# EAGLE board IV51 (EAGLE 7.6.0)
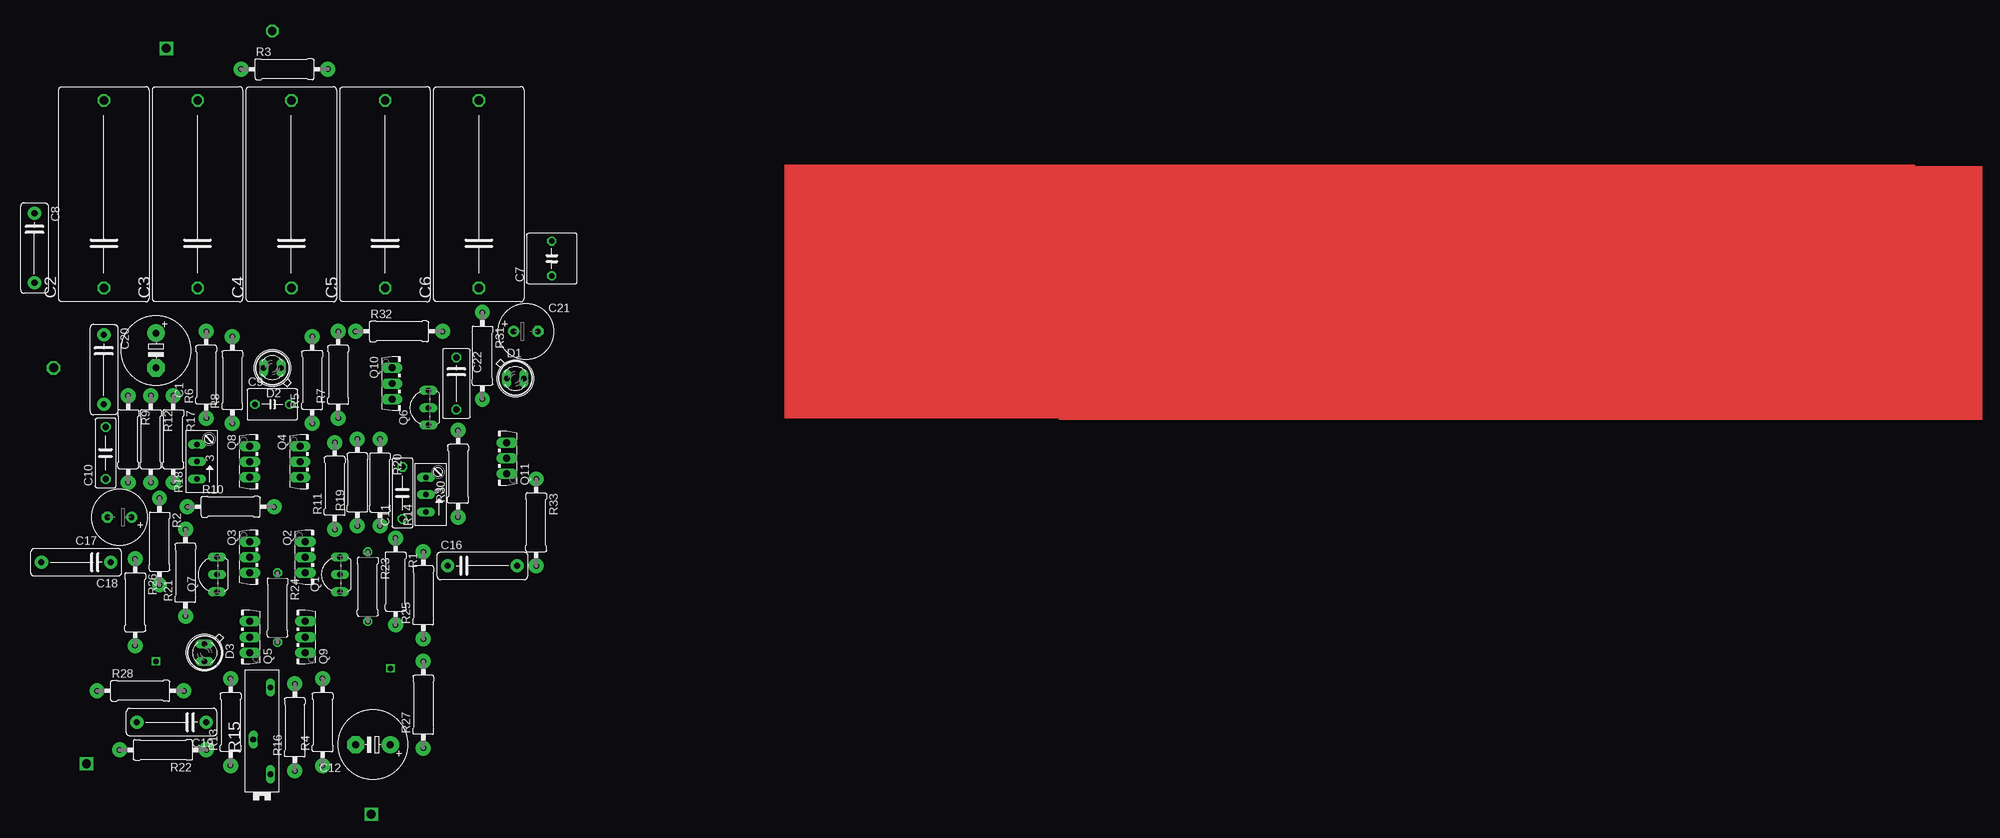
[diagram p0: board, top side]
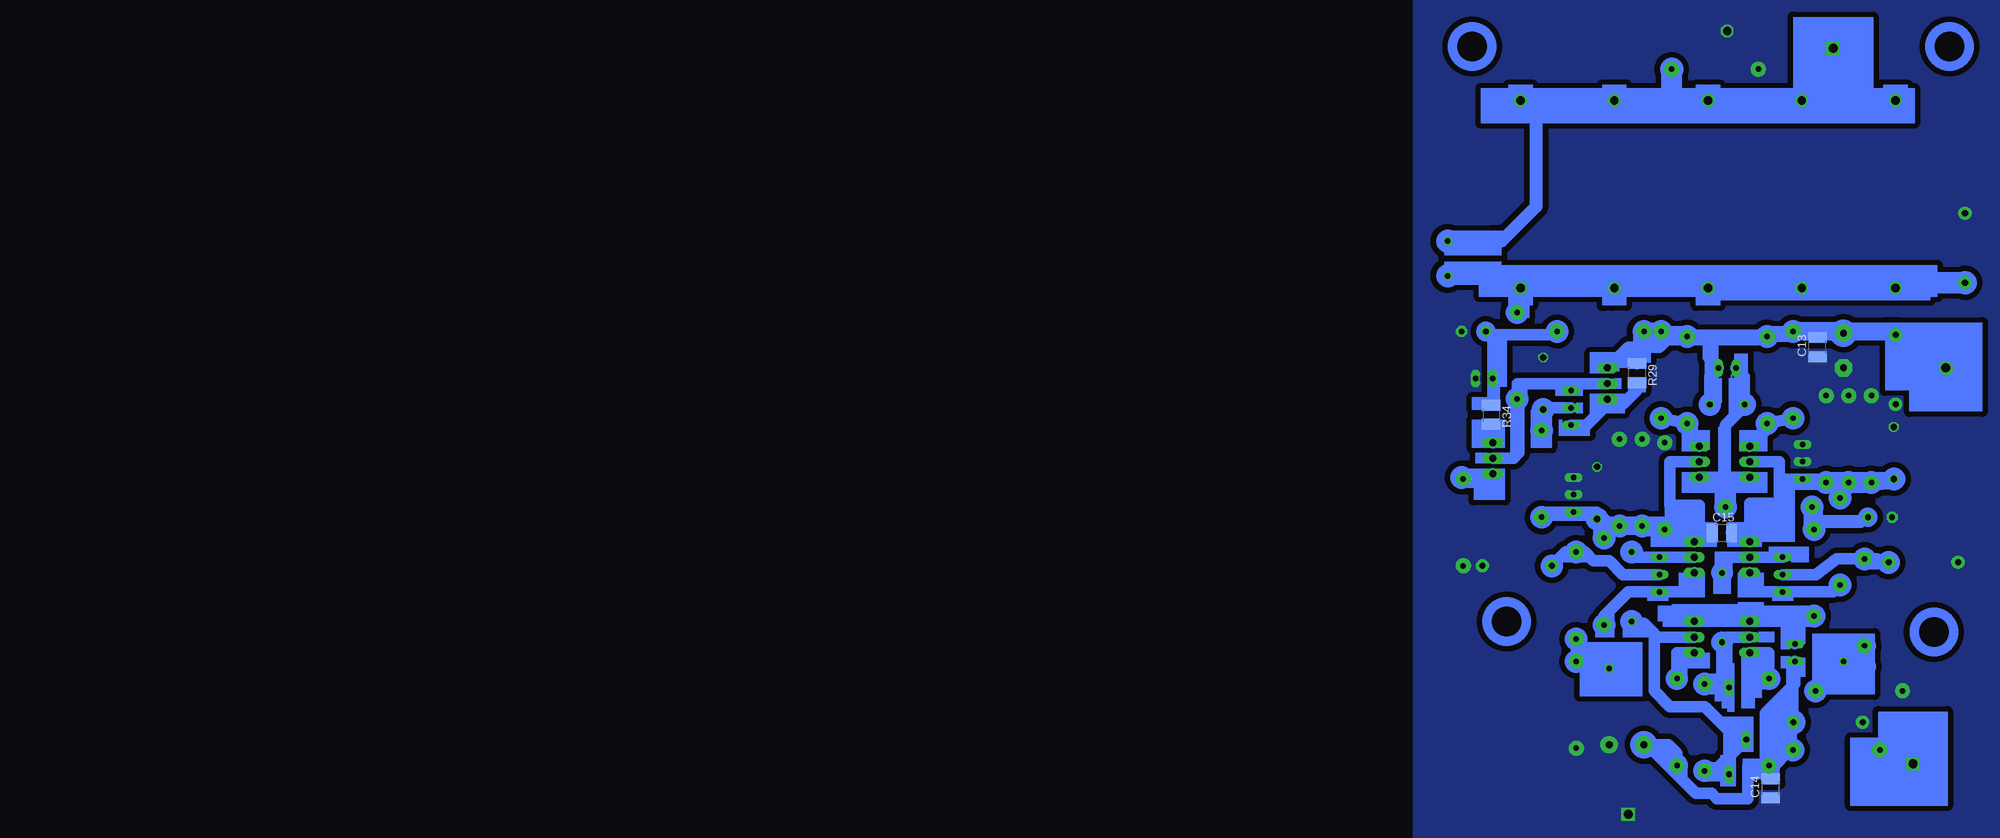
[diagram p1: board, bottom side, seen from below]

No outline drawn. Coordinates in mm, seen from the top.
Copper layers (1*16): Top 0.035mm / dielectric 1.5mm / Bottom 0.035mm
Design rules "default": minimum track width 10mil, minimum drill 24mil, track to track 8mil, track to pad 8mil, pad to pad 8mil, via to via 8mil, smd to smd 8mil, copper to edge 40mil, drill to drill 8mil, minimum pad ring 10mil, minimum via ring 8mil, stop-mask expansion 4mil, vias tented up to drill 0mil, thermal gap 10mil

## Footprints (pad centres in the part's own frame; a part is rotated, then mirrored left to right if it is on the bottom)
E5-10,5 = drill 1.016 pad 2.54: + -2.54,0 | drill 1.016 pad 2.54 octagon: - 2.54,0
C275-134X316 = drill 1.194 octagon: 1 -13.716,0; 2 13.716,0
C050-075X075 = drill 0.813 octagon: 1 -2.54,0; 2 2.54,0
C102-043X133 = drill 0.9 pad 1.93: 1 -5.08,0; 2 5.08,0
C050-045X075 = drill 0.813 octagon: 1 -2.54,0; 2 2.54,0
C075-032X103 = drill 0.914 octagon: 1 -3.81,0; 2 3.81,0
C1210 = smd 1.6 x 2.7: 1 -1.4,0; 2 1.4,0
E3,5-8 = drill 0.813 pad 1.6: + -1.778,0 | drill 0.813 pad 1.6 octagon: - 1.778,0
C075-042X103 = drill 0.914 octagon: 1 -3.81,0; 2 3.81,0
SFH482 = drill 0.813 long: A -1.27,0; K 1.27,0
TO92-EBC = drill 0.813 long: B 0,-1.27; C -2.54,-1.27; E 2.54,-1.27
TO126AV = drill 1.016 long: B 2.286,-1.27; C 0,-1.27; E -2.286,-1.27
0309/12 = drill 0.8 pad 2.184: 1 -6.35,0; 2 6.35,0
RJ9W = drill 0.813 long: A 2.54,0.635; E -2.54,0.635; S 0,0.635
PT-SPIN = drill 0.813 long: A -6.35,-1.27; E 6.35,-1.27; S -1.27,1.27
0309/10 = drill 0.813 octagon: 1 -5.08,0; 2 5.08,0
R1210 = smd 1.6 x 2.7: 1 -1.4,0; 2 1.4,0

## Placement (x,y rotation side)
C1  100uF  [E5-10,5]  -102.62,74.42 270 top
C2  1u5  [C275-134X316]  -110.24,97.28 90 top
C3  1uF  [C275-134X316]  -96.52,97.28 90 top
C4  1uF  [C275-134X316]  -82.8,97.28 90 top
C5  1uF  [C275-134X316]  -69.09,97.28 90 top
C6  1uF  [C275-134X316]  -55.37,97.28 90 top
C7  .1u  [C050-075X075]  -44.7,87.88 90 top
C8  470pF  [C102-043X133]  -120.4,89.41 270 top
C9  680pF  [C050-045X075]  -85.6,66.55 0 top
C10  820pF  [C075-032X103]  -109.98,59.44 90 top
C11  820pF  [C075-032X103]  -66.55,53.59 90 top
C12  100uF  [E5-10,5]  -70.87,16.76 180 top
C13  3n9  [C1210]  -98.81,74.93 90 bottom
C14  3n9  [C1210]  -91.95,10.41 90 bottom
C15  33pF  [C1210]  -84.84,47.75 0 bottom
C16  470pF  [C102-043X133]  -54.86,42.93 0 top
C17  100uF  [E3,5-8]  -107.95,50.04 180 top
C18  470pF  [C102-043X133]  -114.3,43.43 180 top
C19  470nF  [C102-043X133]  -100.33,20.07 180 top
C20  470nF  [C102-043X133]  -110.24,71.63 270 top
C21  100uF  [E3,5-8]  -48.51,77.22 0 top
C22  470pF  [C075-042X103]  -58.67,69.6 270 top
D1  GRN  [SFH482]  -50.04,70.36 0 top
D2  GRN  [SFH482]  -85.6,71.88 180 top
D3  GRN  [SFH482]  -95.5,30.23 270 top
Q1  K170  [TO92-EBC]  -76.96,41.66 90 top
Q2  BD140  [TO126AV]  -79.5,44.2 270 top
Q3  BD140  [TO126AV]  -87.63,44.2 270 top
Q4  BD140  [TO126AV]  -80.26,58.17 270 top
Q5  BD139  [TO126AV]  -90.17,32.51 90 top
Q6  BC550C  [TO92-EBC]  -64.01,66.04 90 top
Q7  K170  [TO92-EBC]  -95,41.66 90 top
Q8  BD140  [TO126AV]  -87.63,58.17 270 top
Q9  BD139  [TO126AV]  -82.04,32.51 90 top
Q10  BD140  [TO126AV]  -66.8,69.6 270 top
Q11  BD139  [TO126AV]  -52.58,58.67 90 top
R1  1K  [0309/12]  -67.56,40.64 270 top
R2  1K  [0309/12]  -102.11,46.48 270 top
R3  49K  [0309/12]  -83.82,115.57 0 top
R4  75  [0309/12]  -78.23,20.07 90 top
R5  39  [0309/12]  -79.76,70.1 90 top
R6  39  [0309/12]  -95.25,70.87 90 top
R7  330  [0309/12]  -75.95,70.87 90 top
R8  330  [0309/12]  -91.44,70.1 90 top
R9  4K  [0309/12]  -106.68,61.47 270 top
R10  4K  [0309/12]  -91.69,51.56 0 top
R11  1K74  [0309/12]  -76.45,54.61 90 top
R12  1K74  [0309/12]  -103.38,61.47 270 top
R13  75  [0309/12]  -91.69,20.07 90 top
R14  10K  [RJ9W]  -62.48,53.34 90 top
R15  500  [PT-SPIN]  -87.12,18.8 90 top
R16  118  [0309/12]  -82.3,19.3 90 top
R17  1K74  [0309/12]  -100.08,61.47 270 top
R18  10K  [RJ9W]  -96.01,58.17 90 top
R19  1K74  [0309/12]  -73.15,55.12 90 top
R20  4K  [0309/12]  -69.85,55.12 270 top
R21  4K  [0309/12]  -98.3,41.91 90 top
R22  75  [0309/12]  -101.6,16 180 top
R23  0  [0309/10]  -71.63,39.88 270 top
R24  0  [0309/10]  -84.84,36.83 270 top
R25  1K  [0309/12]  -63.5,38.61 90 top
R26  1K  [0309/12]  -105.66,37.59 270 top
R27  100K  [0309/12]  -63.5,22.61 90 top
R28  100K  [0309/12]  -104.9,24.64 0 top
R29  1K  [R1210]  -72.39,71.12 270 bottom
R30  1K74  [0309/12]  -58.42,56.39 90 top
R31  118  [0309/12]  -54.86,73.66 270 top
R32  4K  [0309/12]  -67.06,77.22 0 top
R33  118  [0309/12]  -46.99,49.28 270 top
R34  100  [R1210]  -51.05,65.02 270 bottom

## Library data of the parts
C1-C22 R1-R13 R16 R17 R19-R34 = resistor
D1-D3 = led
Q1 Q6 Q7 = transistor-npn
Q2-Q5 Q8-Q11 = transistor-power
R14 R15 R18 = pot

## Nets
AGND: C1.- C8.1 C10.2 C11.2 C12.+ C13.1 C14.1 C16.2 C17.- C18.2 C19.2 C20.2 C21.- C22.1 D1.K R3.1 R9.1 R11.2 R12.1 R14.A R14.S R17.1 R18.A R18.S R19.2 R20.1 R27.1 R28.1 R33.2
N$1: Q9.E R4.2
N$2: Q4.E R5.1 R7.1
N$3: C2.1 C3.1 C4.1 C5.1 C6.1 C7.1 C8.2 R31.1
N$4: Q1.C Q2.B R1.2
N$5: C1.+ C9.2 C13.2 C20.1 D2.A Q10.E R5.2 R6.2 R7.2 R8.2 R29.1 R32.1
N$6: Q3.B Q7.C R2.2
N$7: Q5.E R13.2
N$8: C17.+ R10.1 R21.2
N$9: C16.1 Q1.B R25.2
N$10: Q3.C Q7.E R24.1
N$11: Q8.E R6.1 R8.1
N$12: C10.1 C15.2 Q3.E Q8.C R2.1 R9.2 R12.2 R17.2 R18.E
N$13: C18.1 Q7.B R26.1
N$14: C9.1 D2.K Q4.B Q8.B R10.2
N$15: C22.2 Q6.B R30.2
N$16: Q1.E Q2.C R23.1
N$17: Q5.C R15.E R16.2 R24.2
N$18: Q9.C R15.A R15.S R16.1 R23.2
N$19: R25.1 R27.2
N$20: C12.- C14.2 C19.1 D3.K R4.1 R13.1 R22.1
N$21: D3.A Q5.B Q9.B R21.1
N$22: R26.2 R28.2
N$23: Q6.C Q10.B R29.2
N$24: Q6.E Q10.C Q11.C R31.2
N$25: Q11.B R34.2
N$27: C11.1 C15.1 Q2.E Q4.C R1.1 R11.1 R14.E R19.1 R20.2 R30.1
N$28: R22.2
N$29: C21.+ D1.A R32.2 R34.1
N$30: Q11.E R33.1
OUT: C2.2 C3.2 C4.2 C5.2 C6.2 C7.2 R3.2

## Tracks (layer width: path | path; a pad name or v marks a point on that pad's centre or on a via)
AGND  (via drill 1.2 pad 1.68, 1.3)
  other vias: -85.6,121.16 -71.12,6.6
  pour Bottom (isolate 0.813, no thermals): -40.13,129.29 -66.8,129.29 -96.52,129.21 -125.98,129.29 -125.98,1.02 -40.13,1.02
N$1
  Bottom 1.676: Q9.E -78.23,30.23 R4.2
N$2
  Bottom 1.676: Q4.E -79.76,62.23 R5.1 R7.1
N$3
  Bottom 1.676: R31.1 C6.1
  Bottom 1.93: C7.1 -53.59,85.34 C6.1 C5.1 C4.1 C3.1 C2.1 -111,84.33 C8.2 -120.65,84.33
N$4
  Bottom 1.676: Q2.B -81.03,39.12 Q1.C -71.12,39.12 -67.56,35.56 R1.2
N$5
  Bottom 1.676: C9.2 -83.06,70.61 D2.A -82.8,73.41 -82.8,76.45 | -82.8,76.45 R8.2 R6.2 -95.76,77.72 -98.55,77.72 | -82.8,76.45 R5.2 -78.58,76.69 | -78.58,76.69 R7.2 | -98.55,77.72 -102.62,77.72 | C1.+ -102.62,77.72 | C13.2 -98.55,76.58 -98.55,77.72 | Q10.E -71.12,74.93 | -71.12,74.93 -74.68,74.93 | -74.68,74.93 -75.69,74.93 -77.45,76.69 -78.58,76.69 | R29.1 -71.12,74.55 -71.12,74.93 | C20.1 -109.73,77.47 -102.87,77.47 -102.62,77.72 | R32.1 -74.68,75.44 -74.68,74.93
N$6
  Bottom 1.676: R2.2 -101.09,39.12 Q7.C -90.42,39.12 -88.9,40.64 Q3.B
N$7
  Bottom 1.676: Q5.E -91.69,30.23 R13.2
N$8
  Bottom 1.676: R10.1 -98.3,51.31 -98.3,49.28 | -98.3,49.28 R21.2 | C17.+ -105.16,49.28 -98.3,49.28
N$9
  Bottom 1.676: Q1.B -70.36,41.66 -68.33,43.69 -66.04,43.69 -64.77,44.96 R25.2 -61.98,44.96 C16.1
N$10
  Bottom 1.676: Q7.E Q3.C -86.11,44.2 -84.84,42.93 R24.1
N$11
  Bottom 1.676: Q8.E -91.44,62.99 R8.1 R6.1
N$12
  Bottom 1.676: Q8.C -93.22,58.17 -93.22,54.61 | -93.22,54.61 -93.22,52.07 -88.9,52.07 -88.9,47.75 | -109.73,55.63 -108.2,54.86 -106.43,54.86 | -106.43,54.86 -103.12,54.86 | -103.12,54.86 -102.11,54.86 | -102.11,54.86 -99.82,54.86 | -99.82,54.86 -93.47,54.86 -93.22,54.61 | C10.1 -109.73,55.63 | -109.47,55.63 -109.73,55.63 | R9.2 -106.43,54.86 | R12.2 -103.12,54.86 | R17.2 -99.82,54.86 | -99.82,54.86 -99.57,55.12 -96.27,55.12 -96.65,55.5 R18.E | R2.1 -102.11,54.86 | C15.2 -86.49,48.01 -88.65,48.01 -88.9,47.75 | -88.9,47.75 Q3.E
N$13
  Bottom 1.676: Q7.B -98.55,41.66 -101.6,43.94 R26.1 -107.44,43.94 C18.1
N$14
  Bottom 1.676: Q8.B -85.34,55.88 | -85.34,55.88 Q4.B | -85.34,55.88 -85.34,63.5 -88.14,66.29 C9.1 -88.14,70.61 D2.K | R10.2 -85.34,55.88
N$15
  Bottom 1.676: Q6.B -59.44,66.04 -59.31,65.91 | -59.31,65.91 -57.66,64.26 -57.66,62.74 R30.2 | C22.2 -58.8,65.91 -59.31,65.91
N$16
  Bottom 1.676: Q2.C Q1.E -72.39,44.2 R23.1
N$17
  Bottom 1.676: Q5.C -85.6,32.51 R24.2 -84.84,25.65 | -82.04,25.65 R16.2 -84.84,25.65 | -85.85,24.89 R15.E -85.34,25.65 -84.84,25.65
N$18
  Bottom 1.676: -85.85,14.99 -83.82,12.95 | -83.82,12.95 R16.1 | R15.A -85.34,12.95 -83.82,12.95 | R15.S -85.85,14.99 | -85.85,14.99 -85.85,12.7 | -85.85,14.99 -85.85,18.8 -82.3,22.35 -77.22,22.35 -74.93,24.64 -74.93,32.51 | -74.93,32.51 Q9.C | R23.2 -71.88,34.54 -73.41,34.54 -74.93,33.02 -74.93,32.51
N$19
  Bottom 1.676: R27.2 R25.1
N$20
  Bottom 1.676: -91.19,13.72 R13.1 -91.95,13.46 | -91.19,13.72 -88.65,13.72 -88.65,8.89 -84.07,8.89 -83.31,9.65 -81.03,9.65 -78.23,12.45 | -78.23,12.45 R4.1 -78.23,15.49 -76.96,16.76 -73.91,16.76 | D3.K -95.5,25.65 -91.19,21.34 -91.19,20.07 | -91.19,20.07 -91.19,19.56 | -91.19,19.56 -91.19,13.72 | C12.- -73.91,16.76 | -91.95,13.46 -91.95,13.21 | C19.1 -95,20.07 | -92.96,20.07 -91.19,20.07 | R22.1 -91.69,19.56 -91.19,19.56 | C14.2 -91.95,13.21 | -91.95,13.21 -95,16.26 -95,20.07 | -91.95,13.46 -91.95,19.05 -92.96,20.07 | -92.96,20.07 -95,20.07 | -78.23,12.45 -74.17,16.51 | -74.17,16.51 -73.91,16.51 -73.91,16.76 | -74.17,16.51 -73.91,16.76
N$21
  Bottom 1.676: Q9.B Q5.B -89.66,35.56 -95.76,35.56 | D3.A -95.5,35.31 -95.76,35.56 | -95.76,35.56 R21.1
N$22
  Bottom 1.676: R28.2 R26.2
N$23
  Bottom 1.676: R29.2 -72.39,68.58 -70.36,66.55 -68.83,66.55 -68.33,66.55 | -68.33,66.55 -68.07,66.8 Q10.B | Q6.C -65.02,63.5 -68.07,66.55 -68.33,66.55
N$24
  Bottom 1.676: Q6.E -63.75,69.6 | -63.75,69.6 Q10.C | -63.75,69.6 -54.86,69.6 R31.2 | Q11.C -54.36,58.67 -55.12,59.44 -55.12,66.29 -54.86,66.04 R31.2 | -54.86,66.55 R31.2
N$25
  Bottom 1.676: Q11.B R34.2
N$26  (via drill 1.3 pad 1.68)
  other vias: -117.6,71.88
N$27
  Bottom 1.676: -66.29,50.8 -66.55,50.8 -68.07,49.28 -68.33,49.28 | -66.29,50.8 -63.25,50.8 R14.E -59.18,50.8 R30.1 | R11.1 R19.1 R20.2 -68.58,48.77 | C11.1 -66.29,50.04 -66.29,50.8 | -68.33,49.28 -81.53,49.28 | -81.53,49.28 -81.53,47.75 | -81.53,47.75 Q2.E | Q4.C -77.22,58.17 -77.22,51.82 -81.53,51.82 -81.53,49.28 | R1.1 -68.58,48.77 | -68.58,48.77 -68.58,49.02 -68.33,49.28 | C15.1 -81.53,47.75
N$29
  Bottom 1.676: C21.+ -51.56,75.95 | -51.56,75.95 -51.82,75.69 | -51.82,75.69 -51.82,75.18 -51.56,70.1 | -51.56,70.1 -51.56,66.55 -51.05,66.55 R34.1 | D1.A -51.56,70.1 | -51.56,75.95 -51.82,75.95 | -51.82,75.95 -51.82,75.69 | R32.2 -60.2,76.71 -51.82,76.71 -51.82,75.95
N$30
  Bottom 1.676: Q11.E -51.31,55.37 R33.1
N$31  (via drill 1.3)
  other vias: -112.78,13.97
N$32  (via drill 0.8)
  other vias: -102.62,28.96
N$33  (via drill 0.8)
  other vias: -68.33,27.94
N$35  (via drill 1.3)
  other vias: -101.09,118.62
OUT
  Bottom 1.422: R3.2 -77.47,111.25 -77.72,111 -84.07,111
  Bottom 1.676: C3.2 -96.52,111.25
  Bottom 1.93: C2.2 C3.2 | -96.01,111 C3.2 | -84.58,111 C3.2 | -85.85,111.51 -77.47,111.25 C5.2 -57.66,111 | -57.66,111 C6.2 | C7.2 -52.58,90.42 -57.66,95.5 -57.66,111
  Bottom 2.184: -84.58,111 -84.33,111 -84.07,111 C4.2 -85.85,111.51
(copper drawn outside any net)
  shapes: Bottom area x229, Bottom circle x68, Top area x4